# Altium PCB PlacaPotenciaMPG2.PcbDoc
Units mm, origin at the board's own origin, x right, y up, seen from the top; angles counter-clockwise.
Board outline 200 x 120 mm, 2 copper layers (Top Layer, Bottom Layer), stack 1.671 mm thick; 80 components, 55 nets, 255 pads, 130 vias.
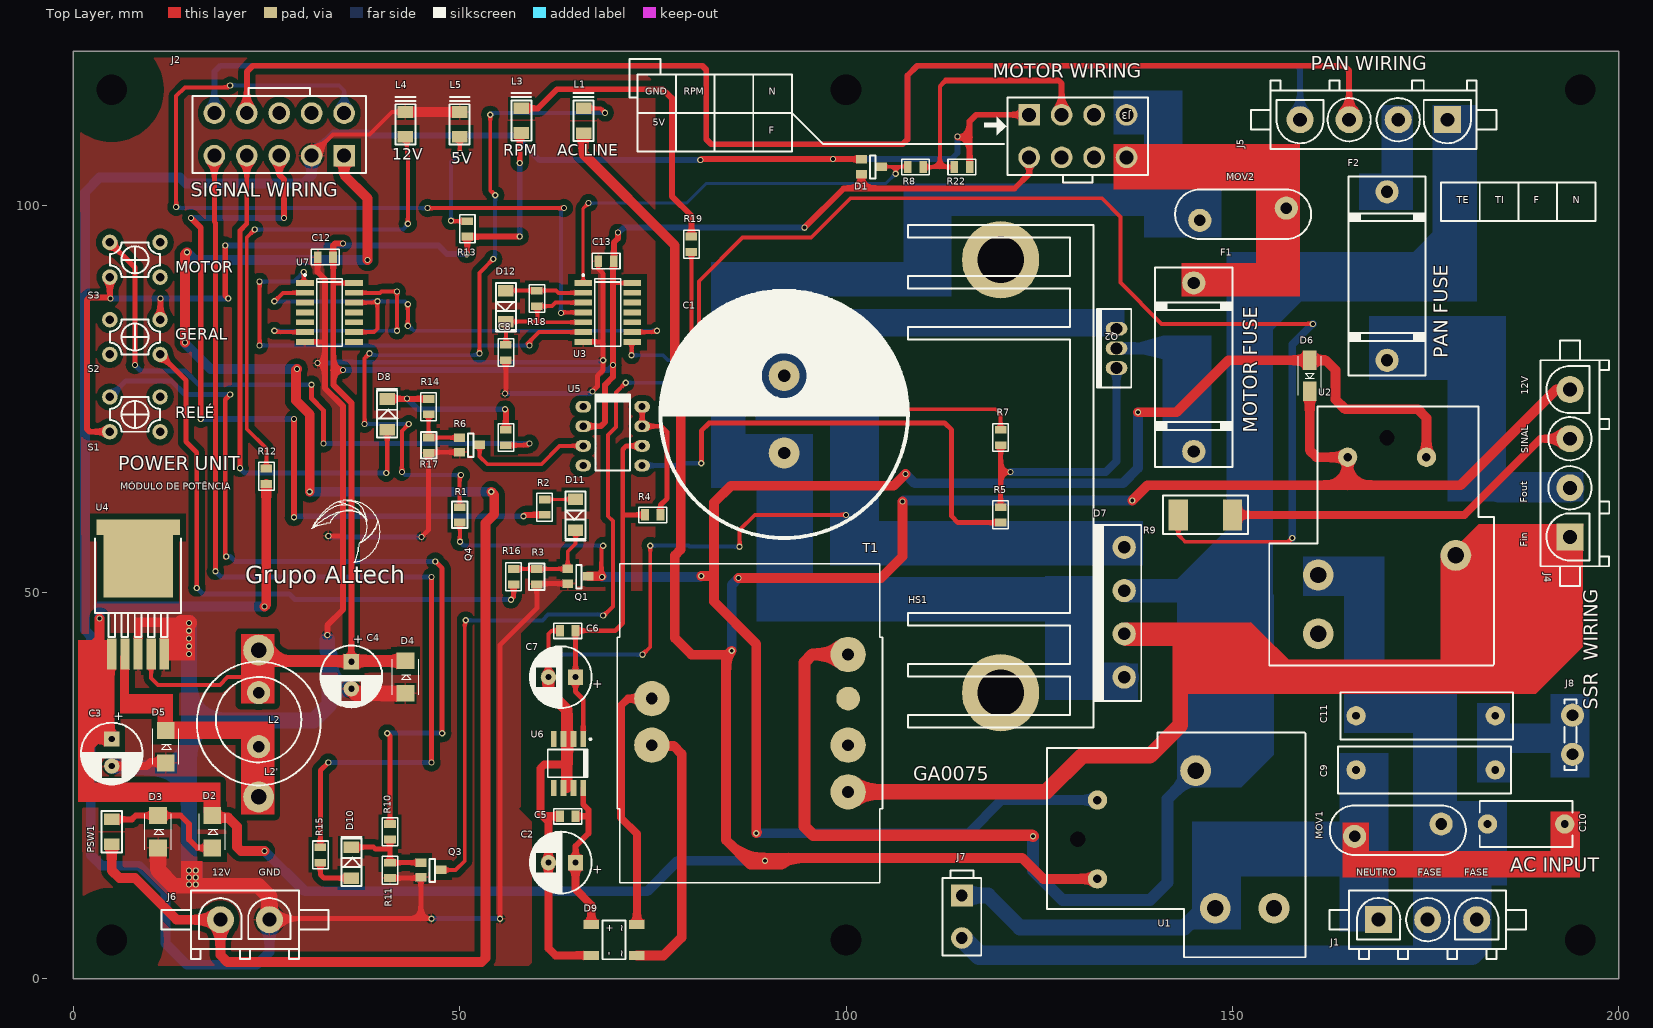
[diagram p0: Top Layer view]
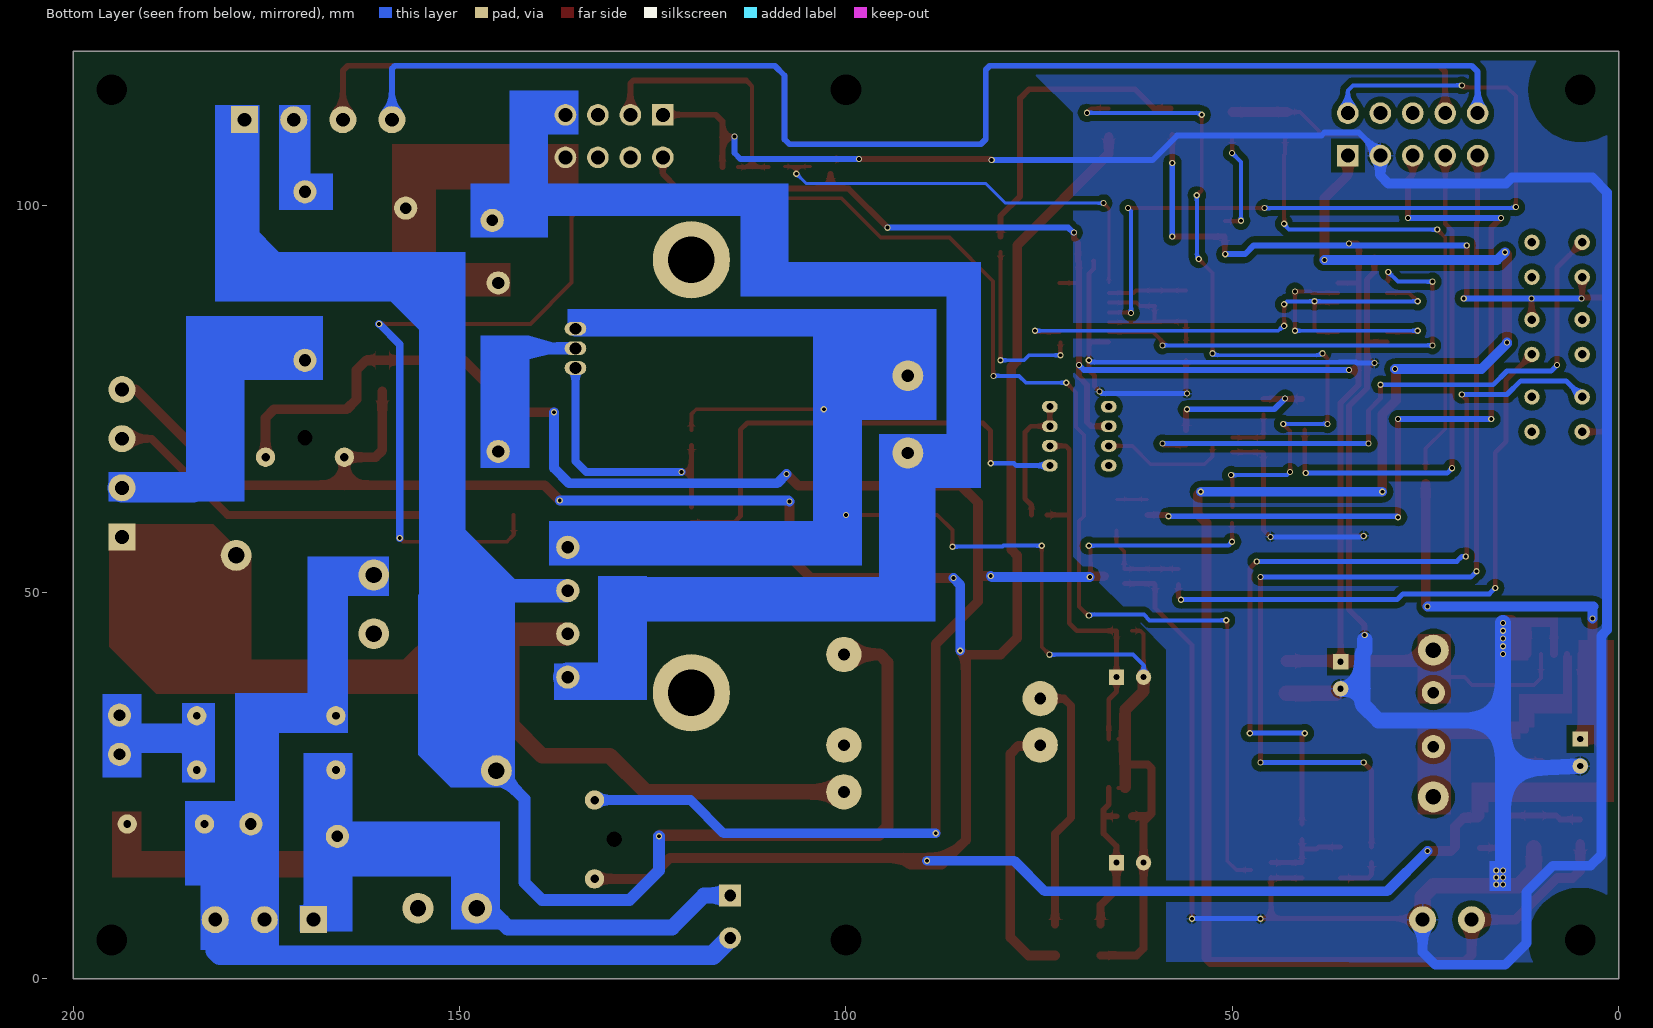
[diagram p1: Bottom Layer view, seen from below]
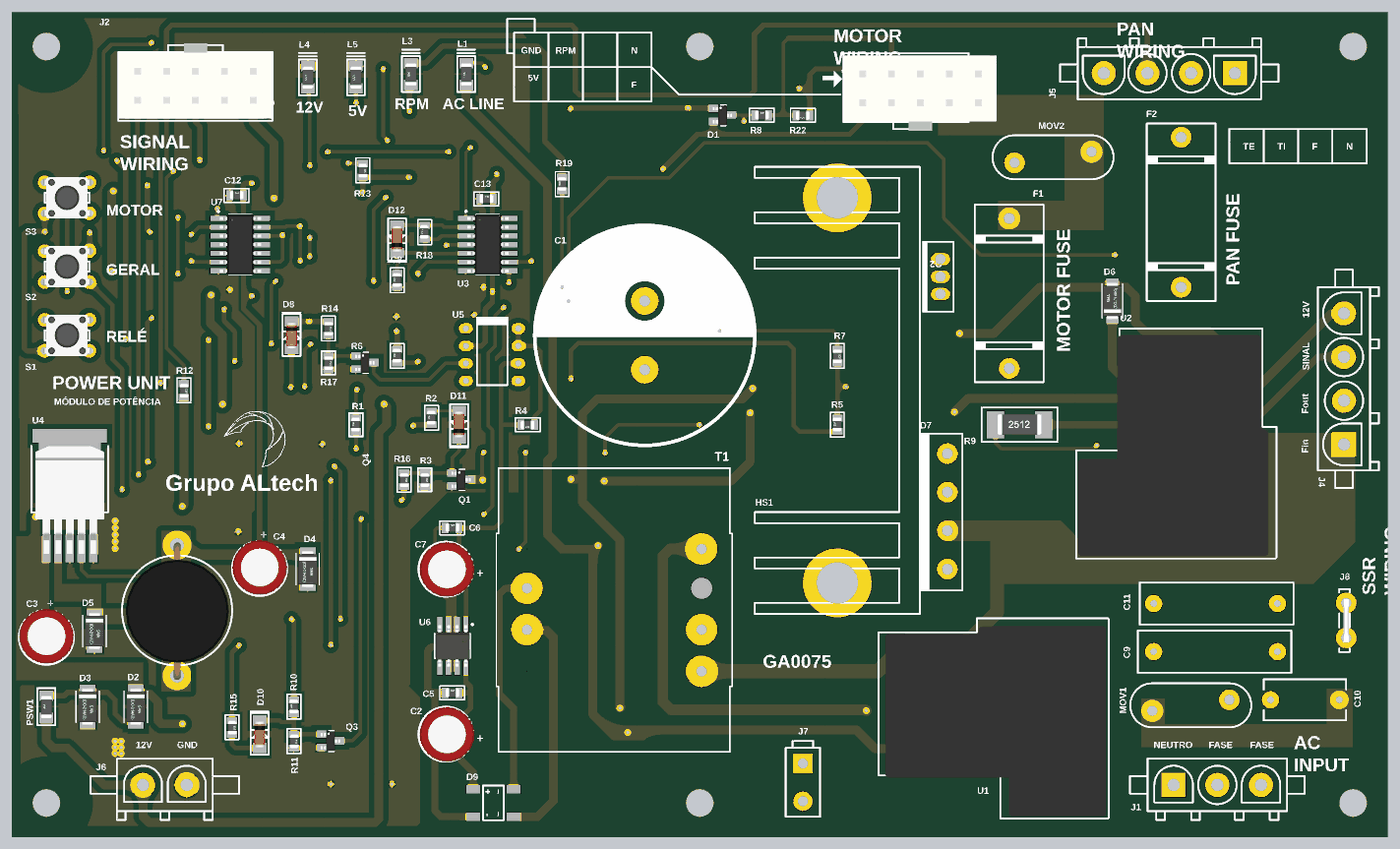
[diagram p2: 3D render of the assembled board from above, using the file's embedded part models]

## Layer stack, top to bottom
Top Solder: solder mask 0.0102, Solder Resist, Dk 3.5
Top Layer: signal copper 0.0356
Dielectric 1: dielectric 1.6, FR-4, Dk 4.8
Bottom Layer: signal copper 0.0356
Bottom Solder: solder mask 0.0102, Solder Resist, Dk 3.5

## Board outline
0,0 200,0 200,120 0,120

## Design rules (kind name [scope] priority, off if disabled: settings)
Clearance Clearance_1 [InPolygon] p1: gap=0.762
Clearance [All] p2: gap=0.3
HoleSize [All] p1: absolutevalues=TRUE maxlimit=10 minlimit=0.025 maxpercent=80.000 minpercent=20.000
PolygonConnect [All] p1: connectstyle=Relief reliefconductorwidth=0.254 reliefentries=4 polygonreliefangle="90 Angle" airgapwidth=0.254
RoomDefinition Potencia [InComponentClass('Potencia')] p1: confinementstyle=ConfineIn formatcopy=TRUE lockcomponents=FALSE outline -27.94,-63.754 22.86,-63.754 22.86,-38.354 -27.94,-38.354
RoomDefinition Sincronismo [InComponentClass('Sincronismo')] p2: confinementstyle=ConfineIn formatcopy=TRUE lockcomponents=FALSE outline -27.94,-63.754 22.86,-63.754 22.86,-38.354 -27.94,-38.354
RoomDefinition ControleSSR [InComponentClass('ControleSSR')] p3: confinementstyle=ConfineIn formatcopy=TRUE lockcomponents=FALSE outline -27.94,-63.754 22.86,-63.754 22.86,-38.354 -27.94,-38.354
RoomDefinition Conectores [InComponentClass('Conectores')] p4: confinementstyle=ConfineIn formatcopy=TRUE lockcomponents=FALSE outline -27.94,-63.754 22.86,-63.754 22.86,-38.354 -27.94,-38.354
RoomDefinition Regulador [InComponentClass('Regulador')] p5: confinementstyle=ConfineIn formatcopy=TRUE lockcomponents=FALSE outline -27.94,-63.754 22.86,-63.754 22.86,-38.354 -27.94,-38.354
RoutingVias [All] p1: holewidth=0.5 width=0.8 viastyle="Through Hole" minholewidth=0.5 minwidth=0.8 maxholewidth=0.5 maxwidth=0.8
SolderMaskExpansion [All] p1: expansion=0.102
UnpouredPolygon [All] p1: allowunpoured=FALSE
Width [All] p1: maxlimit=20.32 minlimit=0.254 preferedwidth=0.508
28 further rules are at their usual default settings.

## Classes and differential pairs
component class Sincronismo: C2 C5 C6 C7 D9 T1 U6
component class Regulador: C3 C4 D2 D3 D4 D5 J6 L2 L2' L4 L5 PSW1 R12 R13 U4
component class Potencia: C1 C8 C12 C13 D1 D7 D8 D12 F1 HS1 J2 J3 L3 MOV2 Q2 Q4 R4 R5 R6 R7 R8 R14 R17 R18 R19 R22 S3 U3 U5 U7
component class Conectores: C9 C10 C11 D6 D11 J1 J7 J8 L1 MOV1 Q1 R1 R2 R3 R16 S2 U1 U2
component class ControleSSR: D10 F2 J4 J5 Q3 R9 R10 R11 R15 S1

## Components (designator, comment, footprint, x,y, rotation, side; value= is the part's Value field where it differs from the comment)
C1 "100uF/400V" "CAP 470UF/400V HITANO" 92,68 r90 top
C2 "100uF/50V" "CAP POL 8x12mm" 65,15 r180 top
C3 "220uF/35V" "CAP POL 8x12mm" 5,31 r270 top
C4 "470uF/35V" "CAP POL 8x12mm" 36,41 r270 top
C5 "100nF/50V-0805" "0805-REVISADO ONDA"#1 64,21 r0 top
C6 "100uF/50V" "CAP POL 8x12mm" 65,39 r180 top
C7 "100nF/50V-0805" "0805-REVISADO ONDA"#1 64,45 r0 top
C8 "100nF/50V-0805" "0805-REVISADO ONDA"#1 56,81 r90 top
C9 "100nF/250V-X2" CAP-250V-PS 184,27 r180 top
C10 "2,2uF/400V-poliester" "CAPACITOR H4" 188,20 r0 top
C11 "100nF/250V-X2" CAP-250V-PS 166,34 r0 top
C12 "100nF/50V-0805" "0805-REVISADO ONDA"#1 32.639,93.345 r0 top
C13 "100nF/50V-0805" "0805-REVISADO ONDA"#1 68.961,92.837 r0 top
D1 "BAT54ST" "SOT23 - REVISADO ONDA" 102,106 r270 top
D2 "1N4007-SMA" DO-214AA 18,19 r90 top
D3 "SMBJ15CA" DO-214AA 11,19 r90 top
D4 "SMBJ5.0CA" DO-214AA 43,39 r90 top
D5 "MBRS360T" DO-214AA 12,30 r90 top
D6 "1N4007" "SMA DIODES" 160,78 r270 top
D7 "KBU1008" KBU-810 136,39 r90 top
D8 "1N5819-SOD80" "MINIMLEF/SOD80 - REVISADO ONDA" 40.64,70.993 r90 top
D9 "MDB10S" "MICRO DIP MDB10S" 70,5 r270 top
D10 "1N5819-SOD80" "MINIMLEF/SOD80 - REVISADO ONDA" 36,13 r90 top
D11 "1N5819-SOD80" "MINIMLEF/SOD80 - REVISADO ONDA" 65,62 r270 top
D12 "1N5819-SOD80" "MINIMLEF/SOD80 - REVISADO ONDA" 56,89 r270 top
F1 "ZH242" ZH242_REVISADO 145,90 r270 top
F2 "ZH242" ZH242_REVISADO 170,80 r90 top
HS1 "FNT006" "DISSIPADOR GRANDE" 120,65 r270 top
J1 "HYLOCK FÊMEA 3 VIAS PARA PCB" "CONECTOR HYLOCK 3 VIAS" 168.91,7.62 r0 top
J2 "MFPL-10" MFPC-10 26.67,109.22 r180 top
J3 "MFPL-08" MFPC-08 130,109 r180 top
J4 "HYLOCK 4 VIAS PCB" "CONECTOR HYLOK 4 VIAS" 193.675,57.15 r90 top
J5 "HYLOCK 4 VIAS PCB" "CONECTOR HYLOK 4 VIAS" 177.8,111.125 r180 top
J6 "HYLOCK 2 VIAS FÊMEA P/ PCB" "CONECTOR HYLOCK 2 VIAS" 19.05,7.62 r0 top
J7 "MFPL-02" MFPC-02 115,8 r180 top
J8 "TERMINAL FASTON 6,3mm" "TERMINAL FASTON" 194,29 r90 top
L1 "LED VERMELHO 0603 SMD" "LED 1206"#1 66.04,109.474 r90 top
L2 "330uH(IMAG 10x10 fio 26AWG)" "INDUTOR 47mH" 24,37 r270 top
L2' "330uH(IMAG 10x10 fio 26AWG)" "INDUTOR LOCO" 24,41 r270 top
L3 "LED VERMELHO 0603 SMD" "LED 1206"#2 58,111 r90 top
L4 "LED VERMELHO 0603 SMD" "LED 1206"#1 43,109 r90 top
L5 "LED VERMELHO 0603 SMD" "LED 1206"#1 50,109 r90 top
MOV1 "S20K275" "VARISTOR 20mm" 177,20 r180 top
MOV2 "S20K275" "VARISTOR 20mm" 156.972,99.695 r180 top
PSW1 "POLYSWITCH 1206, 1A TRIP - 0,5A HOLD" "1206-REVISADO ONDA" 5,19 r90 top
Q1 "BC846L" "SOT23 - REVISADO ONDA" 64,53 r270 top
Q2 "IRF740" "TO220-3 EM PÉ" 135,79 r90 top
Q3 "BC846L" "SOT23 - REVISADO ONDA" 45,15 r270 top
Q4 "BC846L" "SOT23 - REVISADO ONDA" 50,70 r270 top
R1 "22K-0805-5%" "0805-REVISADO ONDA"#2 50,59 r90 top
R2 "1K-0805-5%" "0805-REVISADO ONDA"#1 61,61 r90 top
R3 "10K-0805-5%" "0805-REVISADO ONDA"#2 60,53 r270 top
R4 "10K-0805-5%" "0805-REVISADO ONDA"#1 75,60 r180 top
R5 "100R-0805-5%" "0805-REVISADO ONDA"#1 120,60 r90 top
R6 "10K-0805-5%" "0805-REVISADO ONDA"#1 56,70 r90 top
R7 "100K-0805-5%" "0805-REVISADO ONDA"#1 120,70 r270 top
R8 "1K-0805-5%" "0805-REVISADO ONDA"#1 109,105 r0 top
R9 "100R-2512-5%" "2512 - REVISADO ONDA" 143,60 r0 top
R10 "10K-0805-5%" "0805-REVISADO ONDA"#1 41,19 r90 top
R11 "10K-0805-5%" "0805-REVISADO ONDA"#1 41,14 r270 top
R12 "22K-0805-5%" "0805-REVISADO ONDA"#1 25,65 r270 top
R13 "22K-0805-5%" "0805-REVISADO ONDA"#1 51,97 r270 top
R14 "10K-0805-5%" "0805-REVISADO ONDA"#2 46,70 r270 top
R15 "1K-0805-5%" "0805-REVISADO ONDA"#1 32,16 r270 top
R16 "10K-0805-5%" "0805-REVISADO ONDA"#1 57,52 r270 top
R17 "1K-0805-5%" "0805-REVISADO ONDA"#1 46,74 r270 top
R18 "10K-0805-5%" "0805-REVISADO ONDA"#1 60,88 r90 top
R19 "1K-0805-5%" "0805-REVISADO ONDA"#1 80,95 r90 top
R22 "100K-0805-5%" "0805-REVISADO ONDA"#1 115,105 r180 top
S1 "A06-L12" CHAVE_A06 8,73 r0 top
S2 "A06-L12" CHAVE_A06 8,83 r180 top
S3 "A06-L12" CHAVE_A06 8,93 r0 top
T1 "TRAFO-220V->15V@0,2A" "TRAFO SEVERO 500mA" 75,30 r0 top
U1 "RELÉ SLA CROMATEK" "RELE SLA CROMATEK" 130,18 r270 top
U2 "RELÉ SLA CROMATEK" "RELE SLA CROMATEK" 170,70 r180 top
U3 "74HC14D,653" "SOIC 14 PINOS" 66,90 r0 top
U4 "LM2575S-5.0" TO-263-5 5,42 r0 top
U5 "6N138" DIP-8 66,74 r0 top
U6 "78L05" SOIC-08 66,31 r270 top
U7 "74HC393" "SOIC 14 PINOS" 30,90 r0 top

## Footprints (in the part's own frame and the unit in brackets; to place one, negate y for a bottom-side part, rotate by r counter-clockwise, add the part's x,y. Pads: shape width x height; smd on the part's side, far side on the other; paste and mask are expansions set on the pad)
"0805-REVISADO ONDA"#1 [mm]
  rect 1x1.5 smd: 1(-1,0) 2(1,0)
  silkscreen extent -1.8,-1 1.8,1, body extent -0.96,-0.58 1.04,0.67, height 0.78
"0805-REVISADO ONDA"#2 [mm]
  rect 1x1.5 smd: 1(0,0) 2(2,0)
  silkscreen extent -0.7,-1 2.7,1, body extent 0.04,-0.58 2.04,0.67, height 0.78
"1206-REVISADO ONDA" [mm]
  rect 1.5x2 smd: 1(-1.6,0) 2(1.6,0)
  silkscreen extent -2.7,-1.3 2.7,1.3, body extent -1.65,-0.81 1.55,0.79, height 1
"2512 - REVISADO ONDA" [mm]
  rect 2.5x4 smd: 1(0,0) 2(7,0)
  silkscreen extent -2,-2.5 9,2.5, body extent 0.33,-1.45 6.68,1.55, height 1.6
"CAP 470UF/400V HITANO" [mm]
  round 4 hole 1.6: 1(0,0) 2(10,0)
  silkscreen extent -11,-16 21,16
"CAP POL 8x12mm" [mm]
  rect 2x2 hole 0.8: 1(0,0)
  round 2 hole 0.8: 2(3.5,0)
  silkscreen extent -2.1,-4 5.9,4, body extent -2.25,-3.97 5.75,4.03, height 12
CAP-250V-PS [mm]
  round 2.5 hole 1: 1(0,0) 2(18,0)
  silkscreen extent -2.03,-3.05 20.32,3.05
"CAPACITOR H4" [mm]
  round 2.5 hole 1: 1(-5,0) 2(5,0)
  silkscreen extent -6,-3 6,3
CHAVE_A06 [mm]
  round 2 hole 1.1: 1(-3.25,2.25) 2(-3.25,-2.25) 3(3.25,2.25) 4(3.25,-2.25)
  silkscreen extent -3.25,-2.25 3.25,2.25, body extent -4.11,-3 4.11,3, height 9.5
"CONECTOR HYLOCK 2 VIAS" [mm]
  round 3.5 hole 1.8: 1(0,0) 2(6.35,0)
  silkscreen extent -7.62,-5.08 13.97,3.8
"CONECTOR HYLOCK 3 VIAS" [mm]
  rect 3.5x3.5 hole 1.8: 1(0,0)
  round 3.5 hole 1.8: 2(6.35,0) 3(12.7,0)
  silkscreen extent -6.35,-5.08 19.05,3.8
"CONECTOR HYLOK 4 VIAS" [mm]
  rect 3.5x3.5 hole 1.8: 1(0,0)
  round 3.5 hole 1.8: 2(6.35,0) 3(12.7,0) 4(19.05,0)
  silkscreen extent -6.35,-5.08 25.4,3.8
DIP-8 [mil] "DIP-8 MANCO"
  oval 80x60 hole 36: 1(0,0) 2(0,-100) 3(0,-200) 4(0,-300) 5(300,-300) 6(300,-200) 7(300,-100) 8(300,0)
  silkscreen extent 62,-325 238,63
"DISSIPADOR GRANDE" [mm]
  round 10 hole 6: ""(-28,0) ""(28,0)
  silkscreen extent -32.5,-12 32.5,12
DO-214AA [mm] "SMBJ LITTELFUSE"
  rect 2.15x2.3 smd: 1(-2.1,0) 2(2.1,0)
  silkscreen extent -2.3,-1.7 2.3,1.7, body extent -2.75,-1.4 2.75,1.4, height 2.6
"INDUTOR 47mH" [mm]
  round 3 hole 1.5: 1(0,0) 2(7,0)
  silkscreen extent -2.02,-5.52 9.02,5.52
"INDUTOR LOCO" [mm]
  round 4 hole 2: 1(-1.5,0) 2(17.5,0)
  silkscreen extent 0,-8 16,8, body extent -1.88,-7.47 18.12,7.53, height 13.1
KBU-810 [mm]
  round 3 hole 1.6: 1(0,0) 2(5.6,0) 3(11.2,0) 4(16.8,0)
  silkscreen extent -3.1,-2.2 19.7,4
"LED 1206"#1 [mm]
  rect 1.5x2 smd: 1(-0.076,0) 2(3.124,0)
  silkscreen extent -1.08,-1.3 5.08,1.3, body extent -0.13,-0.81 3.07,0.79, height 1
"LED 1206"#2 [mm]
  rect 1.5x2 smd: 1(-1.6,0) 2(1.6,0)
  silkscreen extent -2.6,-1.3 3.56,1.3, body extent -1.65,-0.81 1.55,0.79, height 1
MFPC-02 [mm]
  rect 2.8x2.8 hole 1.5: 1(0,-2.75)
  round 2.8 hole 1.5: 2(0,2.75)
  silkscreen extent -2.5,-6 2.5,5
MFPC-08 [mm]
  rect 2.8x2.8 hole 1.8: 1(6.3,-2.75)
  round 2.8 hole 1.8: 2(2.1,-2.75) 3(-2.1,-2.75) 4(-6.3,-2.75) 5(6.3,2.75) 6(2.1,2.75) 7(-2.1,2.75) 8(-6.3,2.75)
  silkscreen extent -9.1,-5 9.1,6, body extent -13.19,-4.72 9.41,6.28, height 12.8
MFPC-10 [mm]
  rect 2.8x2.8 hole 1.8: 1(-8.4,2.75)
  round 2.8 hole 1.8: 2(-4.2,2.75) 3(0,2.75) 4(4.2,2.75) 5(8.4,2.75) 6(-8.4,-2.75) 7(-4.2,-2.75) 8(0,-2.75) 9(4.2,-2.75) 10(8.4,-2.75)
  silkscreen extent -11.2,-6 11.2,5, body extent -11.51,-6.28 11.09,4.72, height 12.8
"MICRO DIP MDB10S" [mm]
  rect 1.2x2 smd: 1(-2,-2.95) 2(2,-2.95) 3(2,2.95) 4(-2,2.95)
  silkscreen extent -2.54,-1.5 2.5,1.5
"MINIMLEF/SOD80 - REVISADO ONDA" [mm]
  rect 1.5x2 smd: 1(0,0) 2(4,0)
  silkscreen extent -1,-1.3 5.3,1.3, body extent 0.11,-0.81 3.81,0.79, height 1.61
"RELE SLA CROMATEK" [mm]
  round 2.5 hole 1.1: 1(-5.1,2.54) 2(5.1,2.54)
  round 4 hole 2.1: 3(-8.9,15.24) 4(8.9,25.38) 5(8.9,17.78)
  round 0 hole 2: ""(0,0)
  silkscreen extent -13.86,-4 15.24,29.46, body extent -12.7,-3.02 15,29.08, height 20.1
"SMA DIODES" [mm] "PACKAGE SMA COM DIMENSÕES DO DATASHEET DA DIODES"
  rect 2.5x1.8 smd: 1(-2,0) 2(2,0)
  silkscreen extent -2.5,-1.5 2.5,1.5, body extent -2.75,-1.4 2.75,1.4, height 2.6
"SOIC 14 PINOS" [mil] "SOIC, 14-Leads, Body 8,8x4,0mm (max), Pitch 1,27mm, IPC Medium Density"
  rect 90x30 smd: 1(0,0) 2(0,-50) 3(0,-100) 4(0,-150) 5(0,-200) 6(0,-250) 7(0,-300) 8(250,-300) 9(250,-250) 10(250,-200) 11(250,-150) 12(250,-100) 13(250,-50) 14(250,0)
  silkscreen extent -5,-323 190,45, body extent 8,-323 244,23, height 67
SOIC-08 [mm] "SOIC, 8-Leads, Body 4,9x3,9mm (max), Pitch 1,27mm, IPC Medium Density"
  rect 2.1x0.762 smd: 1(0,0) 2(0,-1.27) 3(0,-2.54) 4(0,-3.81) 5(6.35,-3.81) 6(6.35,-2.54) 7(6.35,-1.27) 8(6.35,0)
  silkscreen extent -0.1,-4.57 4.95,1.06, body extent 0.17,-4.4 6.18,0.6, height 1.75
"SOT23 - REVISADO ONDA" [mm]
  rect 1.1x1.4 smd: 1(0,0) 2(1.9,0) 3(0.95,2.6)
  silkscreen extent -0.5,1.1 2.5,1.8, body extent -0.45,-0.1 2.45,2.7, height 1.3
"TERMINAL FASTON" [mm]
  round 3 hole 1.5: 1(0,0) 2(5.08,0)
  silkscreen extent -2.03,-0.51 7.11,1.02, body extent -0.65,-0.4 5.65,0.4, height 9
"TO220-3 EM PÉ" [mil] "TO220-3 EM PÉ"
  oval 70x110 hole 60: 1(0,0) 2(100,0) 3(200,0)
  silkscreen extent -100,-75 300,100
TO-263-5 [mm]
  rect 1.2x4 smd: 1(0,0) 2(1.7,0) 3(3.4,0) 4(5.1,0) 5(6.8,0)
  rect 9x10 smd: ""(3.4,12.328)
  rect 10.8x2 smd: ""(3.4,16.37)
  silkscreen extent -2.19,2.17 8.99,14.92, body extent -1.6,-0.79 8.4,14.88, height 4.78
"TRAFO SEVERO 500mA" [mil]
  round 180 hole 60: 1(995,470) 2(995,8) 3(995,-230) 4(-5,245) 5(-5,8)
  round 120 smd: Dummy1(995,245)
  round 0 smd: Dummy2(-5,-230) Dummy3(-5,470)
  silkscreen extent -180,-692 1170,933
"VARISTOR 20mm" [mm] "VARISTOR 20mm"
  round 3 hole 1.5: 1(0,0) 2(11.2,1.6)
  silkscreen extent -3.2,-2.4 14.4,4
ZH242_REVISADO [mm] "PORTA FUSÍVEL ZH242 REVISADO EM 2015"
  round 3 hole 1.6: 1(0,0) 2(21.8,0)
  silkscreen extent -2,-5 23.8,5

## Part data
C1: library part 100uF/50V, "100uF/50V"
C3: library part 2200uF/50V, "2200uF/50V"
C4: library part 470uF/50V, "470uF/50V"
C5 C7 C8 C12 C13: library part 100nF/50-0805-NPO
C9 C10 C11: library part 100nF/50-0805-NPO, "100nF/50V-0805"
D2: library part 1N4007, "1N4007"
D3: library part SMBJ30.0A, "SMBJ30.0A"
D4: library part SMBJ5.0A, "SMBJ5.0A"
D5: library part 1N5819-SOD80, "1N5819-SOD80"
D7: library part "KBU 1008"
F1 F2: library part "PORTA FUSÍVEL TIPO BERÇO", "PORTA FUSÍVEL TIPO BERÇO"
HS1: library part "DISSIPADOR 40mm PÉ"
J1: library part PCMC2-3, "PCMC2-3"
J4 J5: library part PCMC2-4, "PCMC2-4"
J6: library part PCMC2-2, "PCMC2-2"
L2 L2': library part "indutor 1mH CNF15", "1mH-CNF15-26 AWG"
PSW1: library part "POLYSWITCH 200mA", "NANOSMDC020F-2"
Q1 Q3 Q4: library part BC846
R2 R17: library part 10K-0805-5%, "10K-0805-5%"
R4 R9: library part 100R-0805-5%, "100R-0805-5%"
R10 R16: library part 1K-0805-5%, "1K-0805-5%"
T1: library part "TRAFO CORRENTE", "TRAFO CORRENTE 1A-5V"
U3: library part 74HC14D, "74HC14D"
U4: library part LM2596S-ADJ, "LM2596S-ADJ"
U6: library part 78L05-SOIC

## Free pads (board coordinates)
  round 0 hole 4: ""(5,5) ""(5,115) ""(100,5) ""(100,115) ""(195,5) ""(195,115)

## Via types
v1: diameter 0.8, hole 0.5, Top Layer to Bottom Layer, 130 vias

## Nets (pads, with @x,y where several pads share a name; then routed paths per layer and width w, separated by ;. In a path a pad name is that pad's centre, name@x,y a point inside that pad or via, vN(x,y) a via of type N, cw(c..) or ccw(c..) an arc to the next point about the centre after c; other vN are vias at no path point)
5V: C4.1 C12.2 C13.2 D1.2 D4.2 J3.5 L2'.1 L2.1 L3.1 R13.2 S1.2 S2.2 S3.2 U3.14 U4.4 U5.2 U7.14 | length 333
  Top Layer w0.508: U4.4 10.1,38.9 11,38 19,38 20,39 24,39 ; 69.85,89.789 70.061,90 U3.14
  Top Layer w0.635: 33.698,90 U7.14
  Top Layer w0.762: v1@4.699,88.138 2.159,88.138 1.778,87.757 1.778,71.12 2.148,70.75 S1.2 ; S3.2 4.75,88.087 v1(4.826,88.011) ; S2.2@11.303,85.303 v1(11.303,88.011) ; v1(19.685,94.869) 19.685,88.392 v1(20.066,88.011) ; C12.2 33.639,94.853 33.909,95.123 v1(34.925,95.123) ; C12.2@33.655,93.329 33.655,78.74 ; v1(34.925,78.74) 33.655,78.74 ; C4.1 36,41.1 36,74.49 33.655,76.835 33.655,78.74 ; v1(50.927,93.726) 51,93.799 R13.2 57.773,96 v1(57.785,96.012) ; v1(57.785,105.537) L3.1@57.785,109.185 ; U5.2 68.285,71.46 68.834,72.009 68.834,76.835 69.85,77.851 v1(69.85,79.375) 69.85,89.789 C13.2@69.85,92.726 ; C13.2@69.977,92.853 69.977,95.25 70.485,95.758 v1(70.485,96.52) ; v1(94.615,97.155) 99.695,102.235 102,102.235 ; D1.2 102,102.235 ; J3.5 123.7,104.142 121.793,102.235 102,102.235
  Top Layer w1.524: L2.1 24,39 L2'.1 ; L2'.1@24.206,41.1 36,41.1 D4.2
  Bottom Layer w0.762: v1(4.826,88.011) v1(11.303,88.011) v1(20.066,88.011) ; v1(19.685,94.869) 47.244,94.869 48.387,93.726 v1(50.927,93.726) ; v1(34.925,78.74) 69.215,78.74 v1(69.85,79.375) ; v1(57.785,96.012) v1(57.785,105.537) ; v1(70.485,96.52) 70.612,96.52 71.247,97.155 v1(94.615,97.155)
11V: C3.1 D2.2 D6.2 J4.4 L1.1 R12.2 U1.2 U2.2 U4.1 | length 467.6
  Top Layer w0.762: C3.1 U4.1
  Top Layer w1.27: 2.54,43.053 3.429,43.942 v1(3.429,46.609) ; C3.1 3,31 2,30 2,25 3,24 17,24 18,23 D2.2 18.272,20.828 20.066,20.828 21.209,19.685 21.209,17.018 21.717,16.51 v1(24.765,16.51) ; v1(24.765,48.133) 25,48.368 R12.2 ; L1.1@66,108.924 66,106.72 77.851,94.869 77.851,79.883 78.613,79.121 78.613,55.499 77.851,54.737 77.851,44.069 80.01,41.91 84.328,41.91 84.455,41.783 84.455,41.656 ; v1(85.217,42.418) 84.455,41.656 ; v1(86.106,51.816) 104.521,51.816 107.315,54.61 v1(107.315,61.722) ; 86.741,15.621 92.583,15.621 ; U1.2 125.53,12.9 122.809,15.621 92.583,15.621 ; v1(137.033,61.849) 139.011,63.827 164.9,63.827 ; D6.2 160,68.346 160.886,67.46 U2.2 164.9,63.827 ; J4.4 191.897,76.2 179.524,63.827 164.9,63.827 ; 84.455,41.656 84.455,17.907 87.63,14.732 91.694,14.732 92.583,15.621
  Bottom Layer w1.27: v1(3.429,46.609) 3.429,48.006 3.302,48.133 v1(24.765,48.133) ; v1(24.765,16.51) 29.972,11.303 74.295,11.303 78.232,15.24 v1(89.535,15.24) ; v1(85.217,42.418) 85.217,50.927 v1(86.106,51.816) ; v1(107.315,61.722) 107.442,61.849 v1(137.033,61.849)
12V: J2.1 J6.1 PSW1.1 | length 227
  Top Layer w1.27: PSW1.1 5,14 6,13 8,13 13.38,7.62 J6.1 19.05,3.048 19.939,2.159 52.832,2.159 53.34,2.667 53.34,58.928 54.483,60.071 54.483,62.611 v1(54.102,62.992) ; v1(14.478,82.296) 14.478,93.726 v1(14.732,93.98) ; v1(28.956,78.867) 28.829,78.74 28.829,74.803 30.607,73.025 v1(30.607,62.992) ; J2.1 35.07,103.995 38.1,100.965 v1(38.1,92.964)
  Bottom Layer w1.27: v1(14.478,82.296) 14.478,82.169 17.78,78.867 v1(28.956,78.867) ; v1(14.732,93.98) 15.748,92.964 v1(38.1,92.964) ; v1(30.607,62.992) v1(54.102,62.992)
15V: C6.1 C7.2 R4.2 U5.6 U6.1 | length 48.9
  Top Layer w0.381: C6.1@65,38.735 C6.1
  Top Layer w0.635: C6.1@65,38.735 65,37.108 66,36.108 U6.1 ; C6.1 C7.2 70.146,45 71.12,45.974 71.12,68.453 71.587,68.92 U5.6 ; 71.191,60 R4.2
300V: C1.1 D7.1 J3.4 MOV2.2 | length 43
  Bottom Layer w3.81: 92,54 C1.1 ; 96,50 120,50 ; 131,39 D7.1
ENERGIZA_LINHA: J2.3 R2.1 | length 104.3
  Top Layer w0.762: v1(15.24,98.425) 16.51,97.155 v1(16.51,72.39) ; J2.3 26.67,104.013 27.305,103.378 v1(27.305,98.425) ; v1(28.575,59.69) v1(28.575,72.39) ; v1(58.293,59.817) 58.476,60 R2.1
  Bottom Layer w0.762: v1(15.24,98.425) v1(27.305,98.425) ; v1(16.51,72.39) v1(28.575,72.39) ; v1(28.575,59.69) 28.702,59.817 v1(58.293,59.817)
ENTRADA_FASE: D7.2 J4.1 T1.3 U2.3 | length 144.6
  Top Layer w2.032: T1.3 125.885,24.158 130.556,28.829 139.319,28.829 143.256,32.766 143.256,44.346 ; D7.2 148.4,44.6 153,40 188,40 193,45 ; U2.3 178.9,40.9 179,40.8 ; 193.675,45.675 J4.1
ENTRADA_NEUTRO: D7.3 J5.1 T1.1 U1.3 | length 220.4
  Top Layer w1.524: T1.1 95.659,41.938 94.615,40.894 94.615,19.685 95.758,18.542 124.079,18.542 v1(124.206,18.415)
  Bottom Layer w1.524: v1(124.206,18.415) 124.206,13.97 128.016,10.16 139.319,10.16 141.605,12.446 141.605,23.265 U1.3
  Bottom Layer w2.54: D7.3 153.797,50.2 ; U1.3 145.24,39.195 154,47.955 154,90 156,92 175,92 ; 177.8,94.8 J5.1
GATE_MOTOR: D8.2 R6.2 R17.1 | length 21
  Top Layer w0.762: D8.2@41,75 R17.1 ; v1(55.88,73.66) 56,73.54 R6.2
  Bottom Layer w0.762: v1(43.18,75.057) 44.577,73.66 v1(55.88,73.66)
GATE_RESISTENCIA: J2.5 R15.1 | length 130.8
  Top Layer w0.635: J2.5 18.27,97.935 18.415,97.79 v1(18.415,52.705) ; R15.1 32,26.92 v1(33.02,27.94) ; v1(46.355,27.94) v1(46.355,51.943)
  Bottom Layer w0.635: v1(18.415,52.705) 19.177,51.943 v1(46.355,51.943) ; v1(33.02,27.94) v1(46.355,27.94)
GND: C3.2 C4.2 C8.1 C12.1 C13.1 D1.1 D3.1 D4.1 D5.1 J2.2 J3.1 J6.2 L4.2 L5.2 Q1.2 Q3.2 Q4.2 R3.2 R11.2 R14.2 R22.1 U3.7 U4.3 U4.5 U7.7 | length 655.4
  Top Layer w0.508: J2.2 33.62,109.22 38.354,109.22 41.258,112.124 L4.2
  Top Layer w0.635: J6.2 25.527,7.747 45,7.747 ; U7.7 32.509,82.38 ; v1(33.02,57.277) 34.938,57.277 ; R11.2 Q3.2@44.9,13 ; Q3.2 45,7.747 ; v1(45.085,57.15) 46,58.065 R14.2 ; R14.2@46.1,68.1 Q4.2 ; v1(46.355,7.747) 45,7.747 ; v1(55.245,7.747) 55.245,43.18 60,47.935 R3.2 ; v1(55.88,75.692) 56,75.812 C8.1 ; R3.2@60.1,51.1 Q1.2 ; U3.7 68.369,82.38 68.58,82.169 ; v1(67.183,75.946) 67.836,76.599 67.836,77.993 68.58,78.738 v1(68.58,80.01) 68.58,82.169 ; C13.1 67.945,92.821 67.945,91.821 68.58,91.186 68.58,82.169
  Top Layer w0.762: v1(31.623,79.629) 32.593,79.629 ; C12.1@31.623,93.329 31.623,91.44 32.593,90.47 32.593,79.629 ; v1(32.893,44.45) 32.893,45.707 34.938,47.752 34.938,57.277 34.938,74.05 32.593,76.395 32.593,79.629 ; v1(81.153,105.918) 81.28,106.045 v1(98.298,106.045) D1.1@101.955,106.045 ; v1(114.427,108.966) 114.427,108.839 116,108.839 ; R22.1 116,108.839 ; J3.1 123.69,111.76 116.84,111.76 116,110.92 116,108.839
  Top Layer w1.016: C3.2 9.5,27.5 10,28 11.9,28 D5.1 ; U4.3 8.4,45.4 ; 9,46 11.6,46 ; U4.5 11.8,45.8
  Top Layer w1.27: L4.2 L5.2
  Top Layer w2.032: D3.1 11,14 13,12 v1@15,12 ; 13,45 14,46 v1(15,46) ; v1(15,14) v1@15,12 ; J6.2 25.4,10.6 24,12 v1@15,12 ; C4.2 36.6,36.9 D4.1
  Bottom Layer w0.635: v1(31.623,79.629) 33.909,79.629 34.038,79.758 36.176,79.758 36.195,79.738 68.308,79.738 v1(68.58,80.01) ; v1(33.02,57.277) 33.147,57.15 v1(45.085,57.15) ; v1(46.355,7.747) v1(55.245,7.747) ; v1(55.88,75.692) 66.929,75.692 v1(67.183,75.946)
  Bottom Layer w0.762: J2.2@30.87,106.689 33.655,109.474 38.1,109.474 38.481,109.093 57.15,109.093 60.325,105.918 v1(81.153,105.918) ; 32.893,43.815 v1(32.893,44.45) ; v1(98.298,106.045) 113.665,106.045 114.427,106.807 v1(114.427,108.966)
  Bottom Layer w1.27: J6.2 25.4,3.429 23.749,1.778 14.732,1.778 11.935,4.575 11.935,11.179 8.509,14.605 3.683,14.605 2.286,16.002 2.286,44.323 1.524,45.085 1.524,101.727 3.429,103.632 13.843,103.632 14.605,102.87 29.845,102.87 30.861,103.886 30.861,106.461 J2.2
  Bottom Layer w2.032: C3.2 15,27 ; v1(15,14) 15,27 ; v1(15,46) v1(15,45) v1(15,44) v1(15,43) v1(15,42) 15,33.401 ; 32.893,43.815 32.893,42.418 33.147,42.164 33.147,37.5 ; C4.2 33.147,37.5 ; 15,27 15,33.401 ; 15,33.401 31.115,33.401 33.147,35.433 33.147,37.5
  other v1: 14.986,12.192 15.875,12.192 14.986,13.081 15.875,13.081 15.875,13.97
GNDPOWER: C1.2 C2.2 C5.1 C6.2 C7.1 D7.4 D9.2 Q2.3 R7.1 U6.2 U6.3 U6.6 U6.7 | length 245.2
  Top Layer w0.508: C6.2 61.5,44.609 61.891,45 C7.1 ; U6.3 63.881,31 U6.2 ; 63.881,24.65 U6.7 ; v1(73.66,41.91) 74.676,42.926 v1(74.676,56.007) ; v1(86.233,55.88) 86.233,58.039 88.194,60 v1(100,60) ; v1(102.87,73.66) 119.38,73.66 120,73.04 R7.1
  Top Layer w1.016: C5.1 60.788,21 ; 63.881,27.559 63.754,27.686 60.96,27.686 60.452,27.178 60.452,21.336 60.788,21 ; D9.2 62.405,3 61.5,3.905 C2.2 61.5,20.288 60.788,21
  Top Layer w1.524: C6.2 61.5,37.179 63.881,34.798 63.881,31 63.881,27.559 63.881,24.777
  Bottom Layer w0.508: C6.2 61.5,40.545 62.865,41.91 v1(73.66,41.91) ; v1(74.676,56.007) 79.629,56.007 79.756,55.88 v1(86.233,55.88) ; 100.66,73.66 v1(102.87,73.66)
  Bottom Layer w2.032: C1.2 98.08,84.08 Q2.3
  Bottom Layer w3.81: C1.2 95,78 100,73 v1(100,60) 104.2,55.8 D7.4
NetC2_1: C2.1 C5.2 D9.1 U6.8 | length 21
  Top Layer w0.762: C5.2 66.593,21 ; C2.1@65.024,15.024 65.024,17.145 66.675,18.796 66.675,21.844 66,22.519 U6.8
  Top Layer w1.016: C2.1 65,11.581 67.05,9.531 D9.1
NetC8_2: C8.2 D12.2 R18.1 U3.3 U3.5 | length 21.3
  Top Layer w0.508: C8.2 D12.2 60.288,85 ; R18.1 R18.1@60.005,86.995 ; U3.5 60.368,84.92 60.288,85 ; U3.3 62.441,87.46 61.976,86.995 R18.1@60.005,86.995 ; R18.1@60.005,86.995 60.071,86.929 60.071,85.217 60.288,85
NetC9_1: C9.1 C11.2 J8.1 J8.2 | length 20.1
  Bottom Layer w2.032: C9.1 184,31 ; C11.2 184,31 ; J8.2 194,31 184,31
NetC9_2: C9.2 C10.2 J1.1 J7.1 MOV1.2 U1.5 | length 116.1
  Top Layer w2.032: MOV1.2 165.8,16.2 167,15 192,15 193,16 C10.2
  Bottom Layer w2.032: J7.1 118.364,10.75 122.51,6.604 143.764,6.604 146.26,9.1 U1.5 147.78,15.78 150.4,18.4 MOV1.2 ; C9.2@165.8,26.8 MOV1.2 ; J1.1 168.91,11.09 165.8,14.2 MOV1.2
NetC10_1: C10.1 C11.1 J1.2 J1.3 J7.2 MOV1.1 U2.5 | length 144.4
  Bottom Layer w2.54: J7.2 117.25,3 181,3 181.61,3.61 J1.3 ; U2.5 165.78,52.22 ; 166,52 167,51 167,42 166,41 C11.1 175,34 177,32 MOV1.1 C10.1 181.61,18.61 J1.3 ; J1.2 J1.3
NetD1_3: D1.3 R8.1 U3.1 | length 56.2
  Top Layer w0.381: U3.1 66,99.655 v1(66.675,100.33) ; D1.3 106.426,105.05 ; v1(106.426,104.14) 106.426,105.05 ; R8.1@107.95,105.05 106.426,105.05
  Bottom Layer w0.381: v1(66.675,100.33) 79.375,100.33 81.915,102.87 105.156,102.87 v1(106.426,104.14)
NetD2_1: D2.1 D3.2 PSW1.2 | length 16.1
  Top Layer w0.762: PSW1.2 7.6,20.6 8.1,21.1 D3.2 13.9,21.1 15,20 15,18 16.1,16.9 D2.1
NetD5_2: D5.2 L2'.2 L2.2 U4.2 | length 27.3
  Top Layer w0.762: U4.2 6.7,36.3 8,35 11,35 12,34 D5.2 18.9,32.1 ; L2'.2 L2.2
NetD6_1: D6.1 Q1.3 R1.1 U1.1 U2.1 | length 248
  Top Layer w0.508: v1(50.038,56.515) R1.1@50.038,58.962 ; v1@68.346,52.05 68.346,55.646 68.58,55.88 v1(68.58,56.007)
  Top Layer w1.27: Q1.3 v1@68.346,52.05 ; v1(81.28,52.07) 82.804,52.07 ; v1@88.519,18.923 v1(88.392,18.796) 88.392,43.307 82.931,48.768 82.931,61.595 85.09,63.754 106.172,63.754 v1(107.696,65.278) ; v1(137.795,73.279) 142.748,73.279 149.469,80 D6.1 160.01,80.01 162.052,80.01 163.322,78.74 163.322,74.93 164.592,73.66 173.99,73.66 175.1,72.55 U2.1
  Bottom Layer w0.508: v1(50.038,56.515) 50.546,56.007 v1(68.58,56.007)
  Bottom Layer w1.27: v1(68.453,51.943) 81.153,51.943 v1(81.28,52.07) ; v1(88.392,18.796) 115.824,18.796 120.128,23.1 U1.1 ; v1(107.696,65.278) 108.885,64.089 135.844,64.089 137.795,66.04 v1(137.795,73.279)
NetD8_1: D8.1 J2.4 | length 65.6
  Top Layer w0.635: v1(21.59,66.04) 21.59,96.774 22.47,97.654 J2.4 ; v1(40.513,65.405) 40.64,65.532 D8.1
  Bottom Layer w0.635: v1(21.59,66.04) 22.225,65.405 v1(40.513,65.405)
NetD9_3: D9.3 T1.5 | length 34.7
  Top Layer w1.27: D9.3 76.406,3 78.74,5.334 78.74,29.083 77.724,30.099 T1.5@74.977,30.099
NetD9_4: D9.4 T1.4 | length 33.6
  Top Layer w1.016: D9.4 72.95,18.744 70.866,20.828 70.866,35.306 71.783,36.223 T1.4
NetD10_1: D10.1 R15.2 | length 5.7
  Top Layer w0.635: R15.2 32,13.466 32.466,13 D10.1
NetD10_2: D10.2 Q3.1 R10.1 R11.1 | length 12
  Top Layer w0.635: D10.2 38.88,17 39.116,16.764 40.873,16.764 ; R10.1 R11.1 Q3.1
NetD11_1: D11.1 R2.2 | length 4
  Top Layer w0.381: R2.2 D11.1
NetD11_2: D11.2 Q1.1 R3.1 R16.1 | length 12.4
  Top Layer w0.508: R16.1 R3.1 Q1.1 64,55.237 65.024,56.261 65.024,57.976 D11.2
NetD12_1: D12.1 R18.2 U3.2 | length 10.1
  Top Layer w0.508: D12.1@56.027,89.027 62.484,89.027 62.781,88.73 U3.2
NetF1_1: F1.1 J3.8 MOV2.1
NetF1_2: F1.2 Q2.2 | length 23
  Bottom Layer w1.524: Q2.2 144.46,81.54 145,81 F1.2
NetF2_1: F2.1 J4.2 | length 37
  Bottom Layer w3.81: F2.1 179,80 182,77 182,66 184.5,63.5 J4.2
NetF2_2: F2.2 J5.2 | length 9.9
  Bottom Layer w3.81: F2.2 171.45,103.25 J5.2
NetJ3_2: J3.2 R8.2 R22.2 | length 34.7
  Top Layer w0.508: R8.2 112.141,105 ; 112.903,116.205 112.141,115.443 112.141,105 ; R22.2 112.141,105
  Top Layer w0.762: 112.903,116.205 127.508,116.205 127.9,115.813 J3.2
NetJ4_3: J4.3 R9.2 | length 47.8
  Top Layer w1.016: R9.2 180.015,60 189.865,69.85 J4.3
NetL1_2: L1.2 R1.2 | length 98.3
  Top Layer w0.508: v1(37.719,71.755) 37.719,80.264 v1(38.354,80.899) ; v1(42.545,65.532) 42.545,70.866 v1(43.434,71.755) ; R1.2 50,64.986 v1(50.165,65.151) ; v1(52.578,80.899) 52.578,91.313 v1(54.356,93.091) ; v1(53.975,111.76) 53.975,101.981 v1(54.61,101.346) ; L1.2 68.25,112.598 v1(68.834,112.014)
  Bottom Layer w0.508: v1(37.719,71.755) v1(43.434,71.755) ; v1(38.354,80.899) 38.608,80.645 52.578,80.645 v1(52.578,80.899) ; v1(42.545,65.532) 42.926,65.151 v1(50.165,65.151) ; v1(53.975,111.76) 54.229,112.014 v1(68.834,112.014) ; v1(54.356,93.091) 54.61,93.345 v1(54.61,101.346)
NetL3_2: L3.2 R19.2 | length 39.9
  Top Layer w0.762: L3.2 60.149,112.6 62.611,115.062 76.327,115.062 77.47,113.919 77.47,101.219 80.01,98.679 R19.2@80.01,96.01
NetL4_1: L4.1 R12.1 | length 64
  Top Layer w0.508: v1(23.495,96.901) 22.461,95.867 22.461,71.12 25,68.581 R12.1 ; L4.1 43.18,108.744 43.18,106.68 43.307,106.553 v1(43.307,97.663)
  Bottom Layer w0.508: v1(23.495,96.901) 42.672,96.901 43.307,97.536 v1(43.307,97.663)
NetL5_1: L5.1 R13.1 | length 13.4
  Top Layer w0.508: v1(48.895,98.044) 48.939,98 R13.1 ; v1(50.038,106.807) L5.1@50.038,108.886
  Bottom Layer w0.508: v1(48.895,98.044) 48.895,105.664 v1(50.038,106.807)
NetQ2_1: Q2.1 R5.2 R7.2 | length 35.7
  Top Layer w0.635: R5.2 120,65.532 ; R7.2 120,65.532 ; v1(121.285,65.532) 120,65.532
  Bottom Layer w1.016: v1(121.285,65.532) 133.604,65.532 135,66.928 Q2.1
NetQ3_3: Q3.3 R9.1 | length 249.1
  Top Layer w0.508: Q3.3 49.483,14.05 50.673,15.24 50.673,46.228 v1(50.8,46.355) ; v1(68.58,46.99) 68.707,46.99 69.85,48.133 69.85,59.182 69.215,59.817 69.215,70.358 70.231,71.374 70.231,75.819 v1(71.501,77.089) ; v1(80.899,77.978) 80.954,78.033 80.954,90.225 86.614,95.885 95.504,95.885 100.584,100.965 133.096,100.965 135.509,98.552 135.509,90.043 140.843,84.709 v1(160.401,84.709) ; R9.1 143,57.404 143.889,56.515 157.226,56.515 v1(157.734,57.023)
  Bottom Layer w0.508: v1(50.8,46.355) 60.706,46.355 61.468,47.117 68.453,47.117 v1(68.58,46.99) ; v1(71.501,77.089) 76.708,77.089 77.597,77.978 v1(80.899,77.978)
  Bottom Layer w1.016: v1(157.734,57.023) 157.734,82.042 v1(160.401,84.709)
NetQ4_1: Q4.1 R14.1 R17.2 | length 7
  Top Layer w0.508: R17.2 R14.1 Q4.1
NetQ4_3: Q4.3 U5.3 | length 16.3
  Top Layer w0.508: Q4.3 52.6,67.542 53.594,66.548 60.579,66.548 62.951,68.92 U5.3
NetR4_1: R4.1 U5.7 U5.8 | length 17.1
  Top Layer w0.635: U5.8 U5.7 76.073,71.46 76.835,70.698 76.835,62.103 76,61.268 R4.1
NetR5_1: R5.1 U5.5 | length 63
  Top Layer w0.635: v1(81.28,66.675) 81.28,70.866 82.296,71.882 112.776,71.882 113.665,70.993 113.665,59.817 114.482,59 R5.1
  Bottom Layer w0.635: U5.5 77.978,66.38 78.273,66.675 v1(81.28,66.675)
NetR6_1: R6.1 S3.1 | length 79.2
  Top Layer w0.635: S3.1 8.001,91.999 v1(8.001,79.375) ; v1(30.861,76.835) 30.861,75.057 32.385,73.533 v1(32.385,69.215) ; R6.1 58.84,69 v1(59.055,69.215)
  Bottom Layer w0.635: v1(8.001,79.375) 8.763,78.613 14.478,78.613 16.256,76.835 v1(30.861,76.835) ; v1(32.385,69.215) v1(59.055,69.215)
NetR10_2: R10.2 S1.1 | length 107.6
  Top Layer w0.635: v1(19.812,54.61) 19.685,54.483 19.685,74.93 v1(20.32,75.565) ; v1(40.64,31.75) 41,31.39 R10.2 ; v1(46.863,53.975) 47.752,53.086 v1(47.752,31.75)
  Bottom Layer w0.635: S1.1 6.843,77.343 12.7,77.343 14.478,75.565 v1(20.32,75.565) ; v1(19.812,54.61) 20.32,54.61 20.955,53.975 v1(46.863,53.975) ; v1(40.64,31.75) v1(47.752,31.75)
NetR16_2: R16.2 S2.1 | length 75.6
  Top Layer w0.635: S2.1 14.605,77.395 14.605,69.469 16.002,68.072 v1(16.002,50.546) ; v1(56.642,49.022) 57,49.38 R16.2
  Bottom Layer w0.635: v1(16.002,50.546) 16.764,49.784 27.94,49.784 28.702,49.022 v1(56.642,49.022)
NetR19_1: R19.1 U3.8 | length 23.7
  Top Layer w0.508: v1(72.263,80.645) U3.8@72.263,82.293 ; v1(80,80) R19.1
  Bottom Layer w0.508: v1(72.263,80.645) 76.317,80.645 76.962,80 v1(80,80)
NetU3_6: U3.6 U7.1 | length 58.9
  Top Layer w0.508: v1(24.13,81.915) v1(24.13,90.17) ; U7.1@29.845,90.155 v1(29.845,91.44) ; v1(59.055,81.915) 58.801,82.169 60.282,83.65 U3.6
  Bottom Layer w0.508: v1(24.13,81.915) v1(59.055,81.915) ; v1(24.13,90.17) 28.575,90.17 v1(29.845,91.44)
NetU3_9: U3.9 U7.2 U7.9 U7.12 | length 70
  Top Layer w0.508: v1(26.035,87.63) 27.135,88.73 U7.2 ; U7.9 38.946,83.65 39.37,84.074 v1@39.37,87.29 ; U7.12 39.2,87.46 v1(39.37,87.63) ; v1(43.307,84.455) v1(43.307,87.249) ; U3.9 75.395,83.65 v1(75.565,83.82)
  Bottom Layer w0.508: v1(26.035,87.63) v1(39.37,87.63) 42.926,87.63 v1(43.307,87.249) ; v1(43.307,84.455) 43.434,84.455 44.069,83.82 v1(75.565,83.82)
NetU7_6: U7.6 U7.13 | length 30.6
  Top Layer w0.508: v1(26.035,83.82) 26.205,83.65 U7.6 ; U7.13 39.708,88.73 39.878,88.9 v1(41.91,88.9) v1(41.91,83.82)
  Bottom Layer w0.508: v1(26.035,83.82) v1(41.91,83.82)
RPM: J2.6 U3.4 | length 106.8
  Top Layer w0.508: v1(13.335,99.822) 13.335,114.173 14.478,115.316 20.066,115.316 v1(20.32,115.57) ; v1(45.847,99.695) v1(63.5,99.695) ; v1(63.119,86.106) 63.203,86.19 U3.4
  Bottom Layer w0.508: v1(13.335,99.822) 13.462,99.695 v1(45.847,99.695) ; v1(20.32,115.57) 34.417,115.57 35.07,114.917 J2.6 ; v1(63.119,86.106) 63.119,99.314 v1(63.5,99.695)
TEMP: J2.9 J5.3 | length 173.5
  Top Layer w0.762: J2.9@22.479,111.979 22.479,117.348 23.241,118.11 81.407,118.11 81.915,117.602 81.915,108.585 82.55,107.95 107.315,107.95 107.95,108.585 107.95,116.84 109.22,118.11 164.465,118.11 165.1,117.475 J5.3
TEMP': J2.10 J5.4 | length 171.5
  Bottom Layer w0.762: J2.10 18.27,117.33 19.05,118.11 81.407,118.11 81.915,117.602 81.915,108.585 82.55,107.95 107.315,107.95 107.95,108.585 107.95,116.84 109.22,118.11 158.369,118.11 158.75,117.729 J5.4
pads on no net: HS1. J2.7 J2.8 J3.3 J3.6 J3.7 S1.3 S1.4 S2.3 S2.4 S3.3 S3.4 T1.2 T1.Dummy1 T1.Dummy2 T1.Dummy3 U1. U1.4 U2. U2.4 U3.10 U3.11 U3.12 U3.13 U4. U5.1 U5.4 U6.4 U6.5 U7.3 U7.4 U7.5 U7.8 U7.10 U7.11

## Polygon pours and split planes (outlines as drawn)
GND on Top Layer "Bottom Layer-No Net" (solid, pour order 2): 1.27,1.651 58.928,1.651 59.309,2.032 59.309,19.939 59.309,20.32 57.658,21.971 57.912,22.225 57.912,35.433 57.912,44.704 61.849,48.641 63.373,50.165 75.311,50.165 75.311,115.824 73.279,117.856 72.009,119.126 0.889,119.126
GND on Bottom Layer "Bottom Layer-No Net" (solid, pour order 6): 1.524,2.032 1.524,115.697 4.572,118.745 40.259,118.745 77.343,118.745 70.612,112.014 70.612,82.423 70.612,54.61 58.547,42.545 58.547,2.159

## Other copper
Top Layer:
  rectangle net ENTRADA_FASE: 142.494,36.83 152.654,44.6
  rectangle net NetF1_1: 143.383,88.265 153.035,92.583
  rectangle net NetF1_1: 153.035,88.265 158.75,96.52
  rectangle net NetF1_1: 153.035,96.52 158.75,102.108
  rectangle net NetF1_1: 134.62,102.108 158.75,107.95
  rectangle net GND: 14.224,41.148 15.748,46.228
  rectangle net GND: 11.684,41.148 15.748,46.736
  rectangle net GND: 7.874,45.974 11.684,46.736
  rectangle net GND: 7.874,43.434 8.89,45.974
  rectangle net NetD5_2: 10.922,32.512 12.954,36.83
  rectangle net NetD5_2: 6.096,34.29 10.922,36.83
  rectangle net NetD5_2: 6.096,35.941 7.239,41.783
  rectangle net 11V: 0.635,30.734 5.207,43.815
  rectangle net 11V: 0.635,22.86 2.794,30.734
  rectangle net 11V: 2.794,22.86 19.05,25.4
  rectangle net 11V: 16.891,21.463 19.05,25.4
  rectangle net NetD5_2: 12.7,30.988 25.654,33.274
  rectangle net NetD5_2: 22.352,22.098 25.654,30.988
  rectangle net NetD5_2: 21.717,21.59 26.035,33.274
  rectangle net NetD5_2: 21.717,21.209 26.035,21.59
  rectangle net 5V: 21.717,35.56 26.035,44.577
  rectangle net GND: 13.97,11.557 16.764,15.24
  rectangle net ENTRADA_FASE: 136.017,43.942 152.4,46.101
  rectangle net ENTRADA_FASE: 135.89,43.053 152.4,45.212
  rectangle net ENTRADA_FASE: 155.956,39.497 188.214,41.275
  rectangle net ENTRADA_FASE: 152.4,36.83 189.23,40.767
  rectangle net ENTRADA_FASE: 176.911,39.624 180.848,54.864
  rectangle net ENTRADA_FASE: 178.689,51.308 194.691,56.642
  rectangle net ENTRADA_FASE: 192.786,43.815 195.326,56.642
  rectangle net ENTRADA_FASE: 179.578,42.291 193.421,52.451
  rectangle net ENTRADA_FASE: 179.451,40.513 189.611,44.196
  rectangle net NetC9_2: 164.211,13.081 167.64,20.193
  rectangle net NetC9_2: 167.64,13.081 194.945,16.51
  rectangle net NetC9_2: 191.135,16.51 194.945,21.59
  region net ENTRADA_FASE: 152.4,46.101 158.75,39.751 152.908,39.751 148.971,43.688 148.971,44.45
  region net ENTRADA_FASE: 152.4,36.83 152.4,43.18 152.527,43.307 151.765,44.069 144.78,44.069
  region net ENTRADA_FASE: 189.23,36.83 195.326,42.926 195.326,43.815 193.757,43.815 192.786,44.786 188.087,40.087 188.087,39.751
  region net ENTRADA_FASE: 195.453,58.801 181.864,58.801 179.578,56.515 181.229,54.864 193.167,54.864
Bottom Layer:
  rectangle net GNDPOWER: 103.632,81.788 104.267,83.82
  rectangle net GNDPOWER: 88.265,72.263 103.886,75.565
  rectangle net NetC9_2: 164.592,6.477 170.18,29.21
  rectangle net NetC9_2: 149.86,6.35 151.13,14.605
  rectangle net NetC9_2: 144.78,13.208 169.418,20.32
  rectangle net NetC9_2: 144.78,6.35 149.86,20.32
  rectangle net 300V: 138.557,95.885 148.59,102.87
  rectangle net 300V: 138.557,98.679 143.51,113.03
  rectangle net 300V: 107.442,98.679 143.51,102.87
  rectangle net GND: 13.97,11.303 16.764,15.24
  rectangle net ENTRADA_NEUTRO: 143.256,26.67 147.193,51.435
  rectangle net ENTRADA_NEUTRO: 135.89,48.641 154.305,51.689
  rectangle net ENTRADA_NEUTRO: 149.225,48.26 155.194,93.98
  rectangle net ENTRADA_NEUTRO: 145.161,46.609 152.654,49.657
  rectangle net ENTRADA_NEUTRO: 145.288,44.704 151.13,47.117
  rectangle net ENTRADA_NEUTRO: 145.161,43.18 150.622,44.958
  rectangle net ENTRADA_NEUTRO: 145.796,41.91 148.209,43.688
  rectangle net ENTRADA_NEUTRO: 155.194,87.63 181.61,93.98
  rectangle net ENTRADA_NEUTRO: 175.895,87.63 181.61,113.03
  rectangle net NetF2_1: 167.64,77.47 185.42,85.725
  rectangle net NetF2_1: 177.8,61.722 185.42,77.47
  rectangle net NetF2_1: 177.8,61.722 195.453,65.532
  rectangle net NetF2_2: 169.291,99.441 173.355,113.03
  rectangle net NetF2_2: 166.37,99.441 173.355,104.14
  rectangle net NetC9_2: 163.83,6.096 170.688,9.525
  rectangle net NetC9_2: 163.83,9.525 169.037,29.21
  rectangle net NetC10_1: 173.355,3.683 183.515,22.987
  rectangle net NetC10_1: 173.355,12.065 185.547,22.987
  rectangle net NetC10_1: 173.355,22.098 179.07,36.957
  rectangle net NetC10_1: 164.465,31.75 173.355,36.957
  rectangle net NetC10_1: 164.465,31.75 169.672,54.61
  rectangle net NetC10_1: 159.131,49.53 164.465,54.61
  rectangle net NetC9_1: 181.61,25.4 185.928,35.687
  rectangle net NetC9_1: 185.166,29.21 196.215,33.02
  rectangle net NetC9_1: 191.135,26.035 196.215,36.83
  rectangle net 300V: 125.73,36.068 137.795,40.767
  rectangle net 300V: 125.73,40.767 132.08,52.07
  rectangle net 300V: 88.392,46.228 125.73,51.943
  rectangle net 300V: 88.392,51.943 95.758,70.485
  rectangle net GNDPOWER: 88.265,75.565 104.267,81.788
  rectangle net GNDPOWER: 97.917,53.467 104.267,81.788
  rectangle net GNDPOWER: 97.917,53.467 138.43,59.182
  rectangle net GNDPOWER: 88.265,83.566 136.017,86.614
  rectangle net GNDPOWER: 88.265,80.645 104.14,86.614
  rectangle net NetF1_2: 140.97,66.04 147.32,83.185
  rectangle net 300V: 134.62,109.22 143.51,114.935
  rectangle net 300V: 82.55,63.5 88.392,70.485
  rectangle net 300V: 82.55,63.5 86.995,92.71
  rectangle net 300V: 86.995,88.265 113.665,92.71
  rectangle net 300V: 107.442,92.456 113.665,101.6
  region net ENTRADA_NEUTRO: 155.321,49.657 155.321,28.956 151.13,24.765 142.875,24.765 142.875,49.022 143.764,49.911
  region net ENTRADA_NEUTRO: 142.875,51.689 149.86,58.674 151.384,58.674 151.384,48.514 149.352,50.546 142.24,50.546
  region net ENTRADA_NEUTRO: 155.194,83.82 155.194,83.947 160.909,89.662 159.639,90.932 152.781,90.932
  region net ENTRADA_NEUTRO: 172.339,92.964 177.8,98.425 178.435,97.79 178.435,92.964
  region net NetF1_2: 137.795,82.296 140.97,82.296 140.97,83.185
  region net NetF1_2: 137.858,80.899 141.034,80.899 141.034,80.137

## Silkscreen, mask and mechanical layers (free items; w line width, h text height)
Top Overlay:
  drawing of 493 lines, arcs and shapes, not listed
  text "PAN WIRING" at 160.147,116.967 h3.05
  text "MOTOR WIRING" at 119,116 h3.05
  text "GND" at 74,114 h1.52
  text "RPM" at 79,114 h1.52
  text "N" at 90,114 h1.52
  text "5V" at 75,110 h1.52
  text "F" at 90,109 h1.52
  text "RPM" at 55.626,105.918 h2.54
  text "AC LINE" at 62.611,105.918 h2.54
  text "12V" at 41.275,105.41 h2.54
  text "5V" at 48.895,104.902 h2.54
  text "SIGNAL WIRING" at 15.24,100.584 h3.05
  text "TE" at 179,100 h1.52
  text "TI" at 184,100 h1.52
  text "F" at 189,100 h1.52
  text "N" at 194,100 h1.52
  text "MOTOR" at 13.208,90.805 h2.54
  text "GERAL" at 13.208,82.169 h2.54
  text "PAN FUSE" at 178.435,80.264 h3.05 r90
  text "12V" at 188.595,75.565 h1.52 r90
  text "RELÉ" at 13.208,72.009 h2.54
  text "MOTOR FUSE" at 153.797,70.612 h3.05 r90
  text "SINAL" at 188.595,67.945 h1.52 r90
  text "POWER UNIT" at 5.865,65.19 h3.05
  text "MÓDULO DE POTÊNCIA" at 6.119,62.904 h1.52
  text "Fout" at 188.468,61.595 h1.52 r90
  text "Fin" at 188.468,55.88 h1.52 r90
  text "Grupo ALtech" at 22.273,50.404 h3.81
  text "SSR  WIRING" at 197.866,34.798 h3.05 r90
  text "GA0075" at 108.712,25.019 h3.05
  text "AC INPUT" at 185.928,13.208 h3.05
  text "12V" at 18,13 h1.52
  text "GND" at 24,13 h1.52
  text "NEUTRO" at 166,13 h1.52
  text "FASE" at 174,13 h1.52
  text "FASE" at 180,13 h1.52
Mechanical 1:
  lines w0.254: 198,125 200,125 200,120 ; 199,125 0,125 0,120 ; 0,0 0,-5 200,-5 200,0 ; 0,0 0,120 ; 0,0 200,0 ; 0,120 200,120 ; 200,0 200,120
  text "BORDA PARA FIXAÇÃO AO PALLET DE MONTAGEM" at 67,122 h3
  text "BORDA PARA FIXAÇÃO AO PALLET DE MONTAGEM" at 63,-3 h3
  text "- PRODUZIR EM 2 Oz/Ft²" at 1.651,-13.081 h4
  text "- Mascara de solda a cor vermelha" at 1.651,-18.542 h4
Drill Drawing:
  circle w0.025: c211.153,86.995 r0.381
  circle w0.025: c211.153,86.995 r0.635
  circle w0.025: c211.153,67.945 r0.635
  lines w0.025: 210.518,71.438 210.836,71.438 211.153,71.12 211.471,71.438 211.788,71.438 211.471,71.755 211.788,72.072 211.471,72.072 211.153,72.39 210.836,72.072 210.518,72.072 210.836,71.755 210.518,71.438 ; 210.518,75.565 211.153,74.93 211.788,75.565 211.153,76.2 210.518,75.565 ; 210.518,80.01 211.788,80.01 211.153,78.74 210.518,80.01 ; 210.518,82.55 211.153,82.867 211.788,82.55 211.471,83.185 211.788,83.82 211.153,83.502 210.518,83.82 210.836,83.185 210.518,82.55 ; 210.518,90.487 210.836,90.487 210.836,90.17 211.471,90.17 211.471,90.487 211.788,90.487 211.788,91.123 211.471,91.123 211.471,91.44 210.836,91.44 210.836,91.123 210.518,91.123 210.518,90.487 ; 210.518,94.297 210.836,94.297 211.153,93.98 211.471,94.297 211.788,94.297 211.471,94.615 211.788,94.932 211.471,94.932 211.153,95.25 210.836,94.932 210.518,94.932 210.836,94.615 210.518,94.297 ; 210.518,105.41 210.518,105.727 210.836,106.045 210.518,106.362 210.518,106.68 210.836,106.68 211.153,106.362 211.471,106.68 211.788,106.68 211.788,106.362 211.471,106.045 211.788,105.727 211.788,105.41 211.471,105.41 211.153,105.727 210.836,105.41 210.518,105.41 ; 210.518,109.22 211.153,109.537 211.788,109.22 211.471,109.855 211.788,110.49 211.153,110.172 210.518,110.49 210.836,109.855 210.518,109.22 ; 210.772,71.564 210.963,71.564 211.153,71.374 211.344,71.564 211.534,71.564 211.344,71.755 211.534,71.945 211.344,71.945 211.153,72.136 210.963,71.945 210.772,71.945 210.963,71.755 210.772,71.564 ; 210.772,79.756 211.534,79.756 211.153,78.994 210.772,79.756 ; 210.772,109.474 211.153,109.664 211.534,109.474 211.344,109.855 211.534,110.236 211.153,110.045 210.772,110.236 210.963,109.855 210.772,109.474
  lines w0.381: 208.788,66.167 307.314,66.167 ; 208.788,115.697 307.314,115.697 ; 222.78,62.357 222.78,119.507 ; 240.505,62.357 240.505,119.507 ; 274.683,62.357 274.683,119.507 ; 287.532,62.357 287.532,119.507 ; 208.788,62.357 307.314,62.357 307.314,119.507 208.788,119.507 208.788,62.357
  text "Symbol" at 211.074,116.84 h1.83
  text "Hit Count" at 223.923,116.84 h1.83
  text "Finished Hole Size" at 241.648,116.84 h1.83
  text "Plated" at 275.826,116.84 h1.83
  text "Hole Type" at 288.675,116.84 h1.83
  text "E" at 210.836,113.347 h1.27
  text "2" at 223.923,113.03 h1.52
  text "6,000mm (236,22mil)" at 241.648,113.03 h1.52
  text "PTH" at 275.826,113.03 h1.52
  text "Round" at 288.675,113.03 h1.52
  text "4" at 223.923,109.22 h1.52
  text "2,000mm (78,74mil)" at 241.648,109.22 h1.52
  text "PTH" at 275.826,109.22 h1.52
  text "Round" at 288.675,109.22 h1.52
  text "6" at 223.923,105.41 h1.52
  text "1,000mm (39,37mil)" at 241.648,105.41 h1.52
  text "PTH" at 275.826,105.41 h1.52
  text "Round" at 288.675,105.41 h1.52
  text "B" at 210.836,101.917 h1.27
  text "6" at 223.923,101.6 h1.52
  text "2,100mm (82,68mil)" at 241.648,101.6 h1.52
  text "PTH" at 275.826,101.6 h1.52
  text "Round" at 288.675,101.6 h1.52
  text "C" at 210.836,98.108 h1.27
  text "6" at 223.923,97.79 h1.52
  text "4,000mm (157,48mil)" at 241.648,97.79 h1.52
  text "PTH" at 275.826,97.79 h1.52
  text "Round" at 288.675,97.79 h1.52
  text "8" at 223.923,93.98 h1.52
  text "0,800mm (31,50mil)" at 241.648,93.98 h1.52
  text "PTH" at 275.826,93.98 h1.52
  text "Round" at 288.675,93.98 h1.52
  text "8" at 223.923,90.17 h1.52
  text "0,914mm (36,00mil)" at 241.648,90.17 h1.52
  text "PTH" at 275.826,90.17 h1.52
  text "Round" at 288.675,90.17 h1.52
  text "8" at 223.923,86.36 h1.52
  text "1,524mm (60,00mil)" at 241.648,86.36 h1.52
  text "PTH" at 275.826,86.36 h1.52
  text "Round" at 288.675,86.36 h1.52
  text "10" at 223.923,82.55 h1.52
  text "1,500mm (59,06mil)" at 241.648,82.55 h1.52
  text "PTH" at 275.826,82.55 h1.52
  text "Round" at 288.675,82.55 h1.52
  text "10" at 223.923,78.74 h1.52
  text "1,600mm (62,99mil)" at 241.648,78.74 h1.52
  text "PTH" at 275.826,78.74 h1.52
  text "Round" at 288.675,78.74 h1.52
  text "16" at 223.923,74.93 h1.52
  text "1,100mm (43,31mil)" at 241.648,74.93 h1.52
  text "PTH" at 275.826,74.93 h1.52
  text "Round" at 288.675,74.93 h1.52
  text "31" at 223.923,71.12 h1.52
  text "1,800mm (70,87mil)" at 241.648,71.12 h1.52
  text "PTH" at 275.826,71.12 h1.52
  text "Round" at 288.675,71.12 h1.52
  text "130" at 223.923,67.31 h1.52
  text "0,500mm (19,69mil)" at 241.648,67.31 h1.52
  text "PTH" at 275.826,67.31 h1.52
  text "Round" at 288.675,67.31 h1.52
  text "245 Total" at 223.923,63.5 h1.52

## Text inside footprints (layer, text, board x,y; h text height)
C2: Top Overlay "+" at 68.556,15 h2 r180
C3: Top Overlay "+" at 5,34.556 h2 r270
C4: Top Overlay "+" at 36,44.556 h2 r270
C6: Top Overlay "+" at 68.556,39 h2 r180
D9: Top Overlay "~" at 70.254,3.73 h1.52 r270; Top Overlay "~" at 70.254,7.032 h1.52 r270; Top Overlay "-" at 68.73,3.476 h1.52 r270; Top Overlay "+" at 68.73,7.032 h1.52 r270